# EAGLE board Ex Build System Lights (EAGLE 7.6.0)
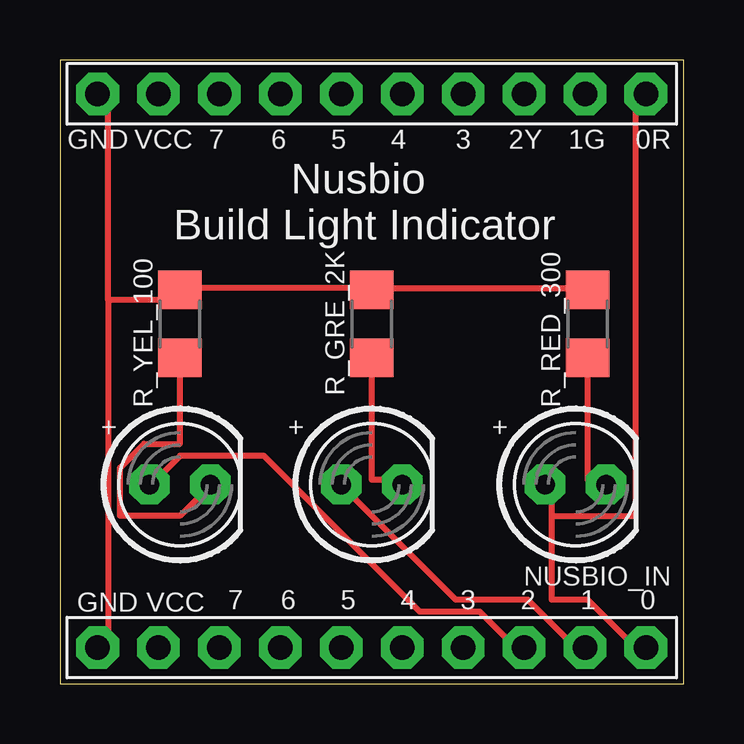
[diagram p0: board, top side]
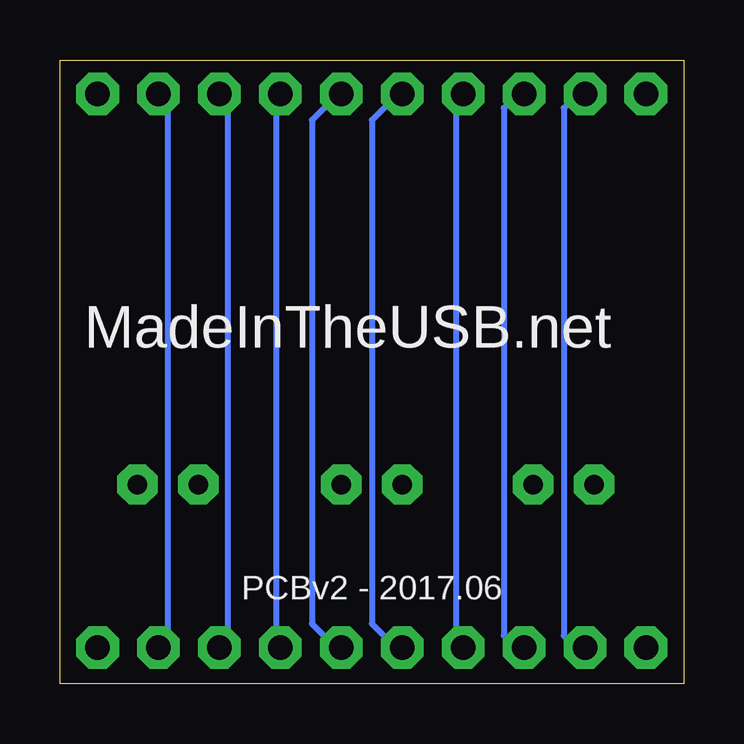
[diagram p1: board, bottom side, seen from below]

Size 26 x 26 mm. Coordinates in mm from the lower left corner, seen from the top.
Outline: 0,0 26,0 26,26 0,26 0,0
Copper layers (1*16): Top 0.035mm / dielectric 1.5mm / Bottom 0.035mm
Design rules "default": minimum track width 10mil, minimum drill 24mil, track to track 8mil, track to pad 8mil, pad to pad 8mil, via to via 8mil, smd to smd 8mil, copper to edge 40mil, drill to drill 8mil, minimum pad ring 10mil, minimum via ring 8mil, stop-mask expansion 4mil, vias tented up to drill 0mil, thermal gap 10mil

## Footprints (pad centres in the part's own frame; a part is rotated, then mirrored left to right if it is on the bottom)
LED5MM = drill 0.813 pad 1.676 octagon: A -1.27,0; K 1.27,0
1X10-BIG = drill 1.016 pad 1.778 octagon: 1 -11.43,0; 2 -8.89,0; 3 -6.35,0; 4 -3.81,0; 5 -1.27,0; 6 1.27,0; 7 3.81,0; 8 6.35,0; 9 8.89,0; 10 11.43,0
R1206 = smd 1.6 x 1.803: 1 -1.422,0; 2 1.422,0

## Placement (x,y rotation side)
GREEN_LED  [LED5MM]  13,8.3 0 top
NUSBIO_IN  PINHD-1X10  [1X10-BIG]  13,1.5 180 top
NUSBIO_OUT  PINHD-1X10  [1X10-BIG]  13,24.59 180 top
R_GRE_2K  [R1206]  13,15 90 top
R_LED  [LED5MM]  21.5,8.3 0 top
R_RED_300  [R1206]  22,15 90 top
R_YEL_100  [R1206]  5,15 90 top
YELLOW_LED  [LED5MM]  5,8.3 0 top

## Library data of the parts
GREEN_LED NUSBIO_IN NUSBIO_OUT R_GRE_2K R_LED R_RED_300 R_YEL_100 YELLOW_LED = adafruit

## Nets
GND: NUSBIO_IN.10 NUSBIO_OUT.10 R_GRE_2K.2 R_RED_300.2 R_YEL_100.2
GPIO1: NUSBIO_IN.1 NUSBIO_OUT.1 R_LED.A
GPIO2: GREEN_LED.A NUSBIO_IN.2 NUSBIO_OUT.2
GPIO3: NUSBIO_IN.3 NUSBIO_OUT.3 YELLOW_LED.A
GPIO4: NUSBIO_IN.4 NUSBIO_OUT.4
GPIO5: NUSBIO_IN.5 NUSBIO_OUT.5
GPIO6: NUSBIO_IN.6 NUSBIO_OUT.6
GPIO7: NUSBIO_IN.7 NUSBIO_OUT.7
GPIO8: NUSBIO_IN.8 NUSBIO_OUT.8
N$1: R_LED.K R_RED_300.1
N$2: GREEN_LED.K R_GRE_2K.1
N$3: R_YEL_100.1 YELLOW_LED.K
VCC: NUSBIO_IN.9 NUSBIO_OUT.9

## Tracks (layer width: path | path; a pad name or v marks a point on that pad's centre or on a via)
GND
  Top 0.254: 13,16.5 5,16.5 R_YEL_100.2 5,16 2,16 | 13,16.5 22,16.5 R_RED_300.2 | 13,16.5 R_GRE_2K.2 | 2,16 2,1.5 NUSBIO_IN.10 | 2,16 2,24.5 NUSBIO_OUT.10
GPIO1
  Top 0.254: 20.5,7 20.5,3.5 22,3.5 24,1.5 NUSBIO_IN.1 | 20.5,7 20.5,8 R_LED.A | 20.5,7 24,7 24,24.5 NUSBIO_OUT.1
GPIO2
  Top 0.254: GREEN_LED.A 12,8 16.5,3.5 19.5,3.5 21.5,1.5 NUSBIO_IN.2
  Bottom 0.254: NUSBIO_OUT.2 21.5,24.5 21.5,1.5 NUSBIO_IN.2
GPIO3
  Top 0.254: YELLOW_LED.A 4,8.5 5,9.5 8.5,9.5 15,3 17.5,3 19,1.5 NUSBIO_IN.3
  Bottom 0.254: NUSBIO_OUT.3 19,24.5 19,1.5 NUSBIO_IN.3
GPIO4
  Bottom 0.254: NUSBIO_IN.4 17,1.5 17,24.5 NUSBIO_OUT.4
GPIO5
  Bottom 0.254: NUSBIO_IN.5 14.5,1.5 15.5,2.5 15.5,23.5 14.5,24.5 NUSBIO_OUT.5
GPIO6
  Bottom 0.254: NUSBIO_IN.6 12,1.5 13,2.5 13,23.5 12,24.5 NUSBIO_OUT.6
GPIO7
  Bottom 0.254: NUSBIO_IN.7 9.5,1.5 9.5,24.5 NUSBIO_OUT.7
GPIO8
  Bottom 0.254: NUSBIO_IN.8 7,1.5 7.5,2 7.5,24 7,24.5 NUSBIO_OUT.8
N$1
  Top 0.254: R_RED_300.1 22,8.5 22.5,8.5 R_LED.K
N$2
  Top 0.254: R_GRE_2K.1 13,8.5 14,8.5 GREEN_LED.K
N$3
  Top 0.254: R_YEL_100.1 5,10 3.5,10 2.5,9 2.5,7 5,7 6,8 YELLOW_LED.K
VCC
  Bottom 0.254: NUSBIO_IN.9 4.5,1.5 5,2 5,24 4.5,24.5 NUSBIO_OUT.9

## Text on the board
tNames: GND | VCC | 7 | 6 | 5 | 4 | 3 | 2Y | 1G | 0R | Nusbio / Build Light Indicator | + | + | + | GND | VCC | 7 | 6 | 5 | 4 | 3 | 2 | 1 | 0
bNames: MadeInTheUSB.net | PCBv2 - 2017.06